# Altium PCB backplane.PCBDOC (part 4 of 4)
Units mil, origin at the board's own origin, x right, y up, seen from the top; angles counter-clockwise.
Board outline 14000 x 4750 mil, 6 copper layers (Top Layer, Internal Plane 1, Mid-Layer 1, Mid-Layer 2, Internal Plane 2, Bottom Layer), stack 54.4 mil thick; 197 components, 240 nets, 1698 pads, 1024 vias.
Unrouted connection lines stored in the file: 2.
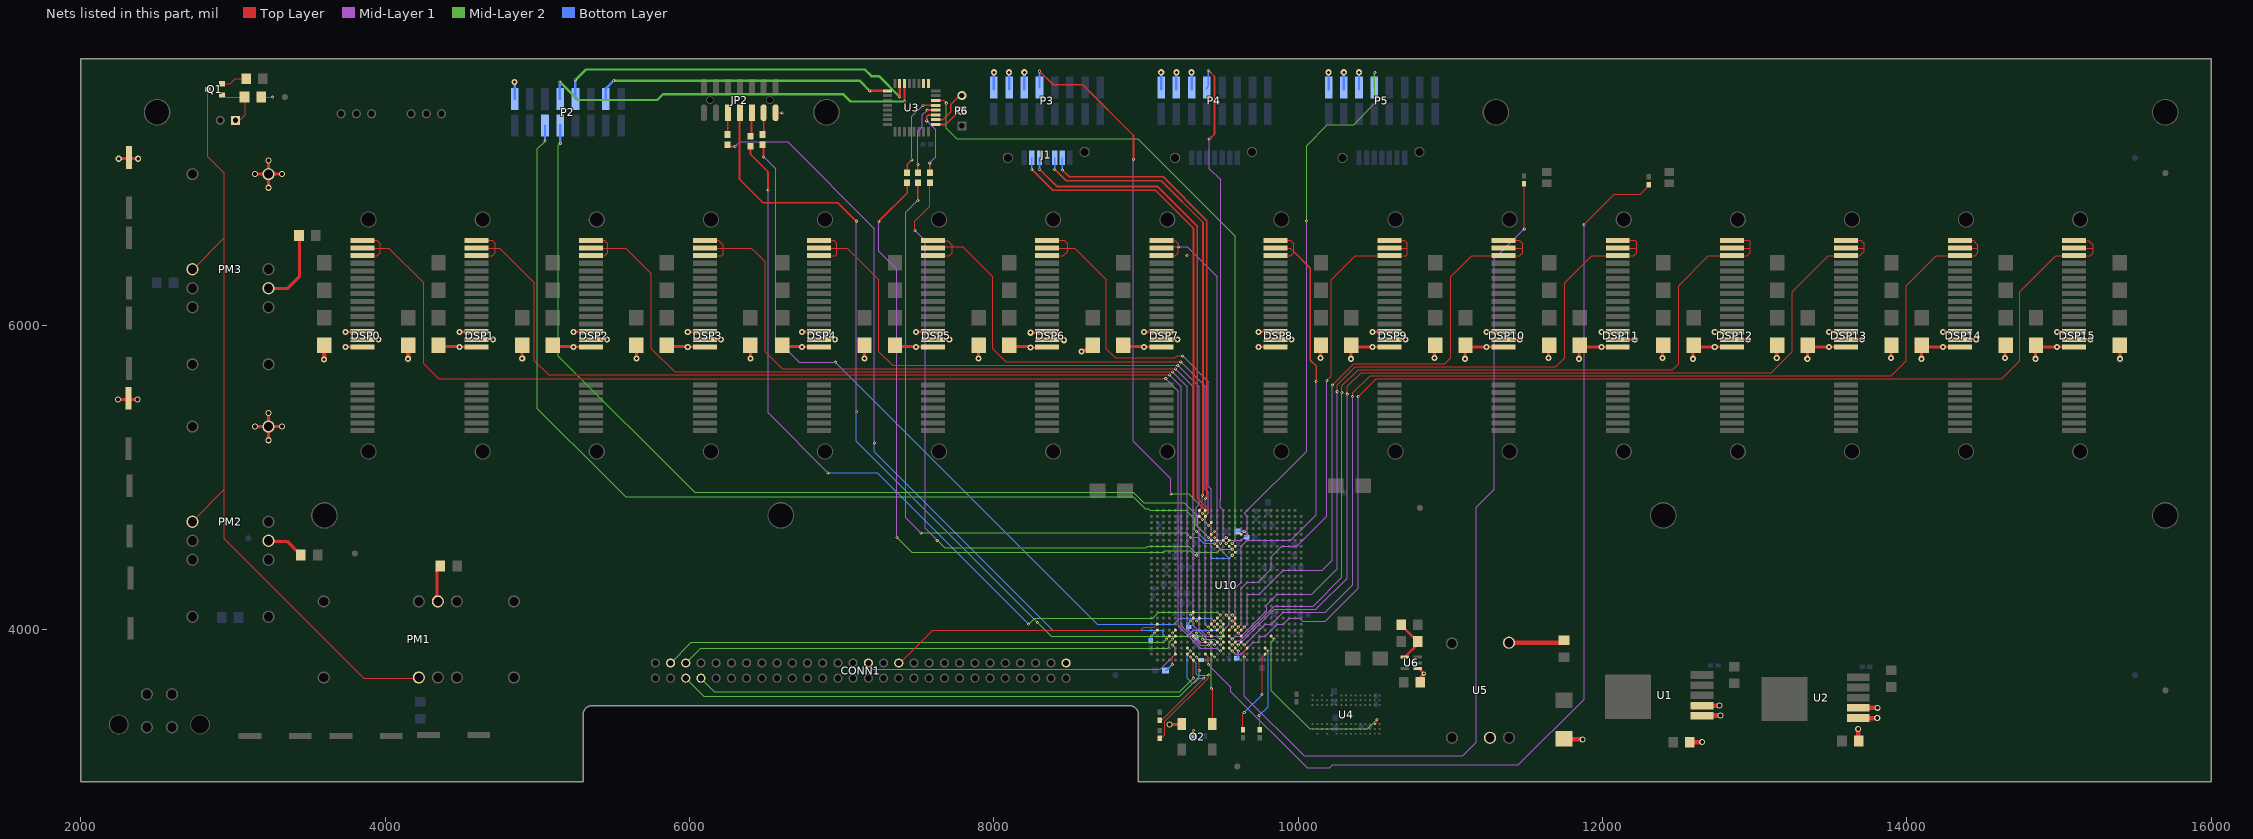
[diagram p8: the nets of this part, all layers, seen from the top]

## Via types
v1: diameter 40, hole 20, Top Layer to Bottom Layer, 338 vias
v2: diameter 20, hole 10, Top Layer to Bottom Layer, tented top, 325 vias
v3: diameter 20, hole 10, Top Layer to Bottom Layer, 197 vias
v4: diameter 40, hole 25, Top Layer to Bottom Layer, 113 vias
v5: diameter 50, hole 25, Top Layer to Bottom Layer, 48 vias
v6: diameter 30, hole 15, Top Layer to Bottom Layer, 3 vias

## Nets (pads, with @x,y where several pads share a name; then routed paths per layer and width w, separated by ;. In a path a pad name is that pad's centre, name@x,y a point inside that pad or via, vN(x,y) a via of type N, cw(c..) or ccw(c..) an arc to the next point about the centre after c; other vN are vias at no path point) (continued)
NetDSP0_P13: DSP0.P13 DSP0.P14 DSP0.P15 U10.AD13 | length 8285.4
  Top Layer w6: DSP0.P14@3850.63,6507.4 4024.09,6507.4 4251.97,6279.53 4251.97,5748.03 4350.39,5649.61 v3(9129.92,5649.61) ; v2(9488.19,3858.27) U10.AD13@9507.87,3877.95
  Top Layer w8: DSP0.P13@3850.63,6457.4 3851.34,6456.69 3946.85,6456.69 3966.54,6476.38 3966.54,6535.43 3944.57,6557.4 DSP0.P15@3850.63,6557.4
  Mid-Layer 1 w6: v3(9129.92,5649.61) 9212.6,5566.93 9212.6,4025.59 9360.24,3877.95 9468.5,3877.95 v2(9488.19,3858.27)
NetDSP1_P13: DSP1.P13 DSP1.P14 DSP1.P15 U10.AC11 | length 7460.1
  Top Layer w6: DSP1.P14@4600.63,6507.4 4752.44,6507.4 4980.31,6279.53 4980.31,5767.72 5074.8,5673.23 v3(9153.54,5673.23) ; v2(9409.45,3897.64) U10.AC11@9429.13,3917.32
  Top Layer w8: DSP1.P13@4600.63,6457.4 4705.43,6457.4 4724.41,6476.38 4724.41,6535.43 4702.44,6557.4 DSP1.P15@4600.63,6557.4
  Mid-Layer 1 w6: v3(9153.54,5673.23) 9232.28,5594.49 9232.28,4025.59 9360.24,3897.64 v2(9409.45,3897.64)
NetDSP2_P13: DSP2.P13 DSP2.P14 DSP2.P15 U10.AC12 | length 6713.8
  Top Layer w6: DSP2.P14@5362.68,6507.4 5579.21,6507.4 5748.03,6338.58 5748.03,5846.46 5901.57,5692.91 v3(9173.23,5692.91) ; v2(9448.82,3897.64) U10.AC12@9468.5,3917.32
  Top Layer w8: DSP2.P13@5350.63,6457.4 5443.62,6457.4 5462.6,6476.38 5462.6,6535.43 5440.63,6557.4 DSP2.P15@5350.63,6557.4
  Mid-Layer 1 w6: v3(9173.23,5692.91) 9271.65,5594.49 9271.65,4005.91 9360.24,3917.32 9429.13,3917.32 v2(9448.82,3897.64)
NetDSP3_P13: DSP3.P13 DSP3.P14 DSP3.P15 U10.AC13 | length 6077.1
  Top Layer w6: DSP3.P14@6100.63,6507.4 6405.98,6507.4 6437.01,6476.38 6496.06,6417.32 6496.06,5826.77 6610.24,5712.6 v3(9192.91,5712.6) ; v2(9488.19,3897.64) U10.AC13@9507.87,3917.32
  Top Layer w8: DSP3.P13@6100.63,6457.4 6211.34,6457.4 6220.47,6466.54 6220.47,6525.59 6188.66,6557.4 DSP3.P15@6100.63,6557.4
  Mid-Layer 1 w6: v3(9192.91,5712.6) 9311.02,5594.49 9311.02,4025.59 9399.61,3937.01 9448.82,3937.01 v2(9488.19,3897.64)
NetDSP4_P13: DSP4.P13 DSP4.P14 DSP4.P15 U10.AB13 | length 5271.2
  Top Layer w6: DSP4.P14@6850.63,6507.4 7035.91,6507.4 7244.09,6299.21 7244.09,5826.77 7334.65,5736.22 v3(9208.66,5736.22) ; v2(9488.19,3937.01) U10.AB13@9507.87,3956.69
  Top Layer w8: DSP4.P13@6850.63,6457.4 6959.37,6457.4 6968.5,6466.54 6968.5,6535.43 6946.54,6557.4 DSP4.P15@6850.63,6557.4
  Mid-Layer 1 w6: v3(9208.66,5736.22) 9350.76,5594.13 9350.76,4901.57 ; 9350.39,4665.35 9330.71,4685.04 9330.71,4803.15 9350.39,4822.83 9350.39,4901.57 ; 9350.76,4665.35 9350.76,4005.54 9399.61,3956.69 9468.5,3956.69 v2(9488.19,3937.01)
NetDSP5_P13: DSP5.P13 DSP5.P14 DSP5.P15 U10.AA11 | length 4392.3
  Top Layer w6: DSP5.P14@7618.11,6515.75 7795.28,6515.75 7992.13,6318.9 7992.13,5846.46 8078.74,5759.84 v3(9228.35,5759.84) ; v2(9409.45,4015.75) U10.AA11@9429.13,3996.06
  Top Layer w8: DSP5.P13@7598.43,6466.54 7607.56,6457.4 7707.4,6457.4 7726.38,6476.38 7726.38,6525.59 7696.85,6555.12 DSP5.P15@7598.43,6555.12
  Mid-Layer 1 w6: v3(9228.35,5759.84) 9389.76,5598.43 9389.76,4921.26 9409.45,4901.57 9409.45,4763.78 9389.76,4744.09 9389.76,4035.43 v2(9409.45,4015.75)
NetDSP6_P13: DSP6.P13 DSP6.P14 DSP6.P15 U10.AA12 | length 3693.1
  Top Layer w6: DSP6.P14@8350.63,6507.4 8531.97,6507.4 8740.16,6299.21 8740.16,5846.46 8799.21,5787.4 9192.91,5787.4 9204.72,5799.21 v3(9240.16,5799.21) ; v2(9448.82,4015.75) U10.AA12@9468.5,3996.06
  Top Layer w8: DSP6.P13@8350.63,6457.4 8455.43,6457.4 8484.25,6486.22 8484.25,6535.43 8462.28,6557.4 DSP6.P15@8350.63,6557.4
  Mid-Layer 1 w6: v3(9240.16,5799.21) 9409.45,5629.92 9409.45,4940.94 9429.13,4921.26 9429.13,4035.43 v2(9448.82,4015.75)
NetDSP7_P13: DSP7.P13 DSP7.P14 DSP7.P15 U10.AA13 | length 3135.5
  Top Layer w6: DSP7.P13@9114.17,6456.69 9192.91,6456.69 9212.6,6476.38 9212.6,6535.43 9192.91,6555.12 DSP7.P15@9114.17,6555.12 ; DSP7.P14@9114.17,6515.75 v3(9212.6,6515.75) ; v2(9488.19,3976.38) U10.AA13@9507.87,3996.06
  Mid-Layer 1 w6: v3(9212.6,6515.75) 9271.65,6515.75 9468.5,6318.9 9468.5,4547.24 9547.24,4468.5 9547.24,4035.43 v2(9488.19,3976.38)
  other v3: 9270.94,6457.4
NetDSP8_P13: DSP8.P13 DSP8.P14 DSP8.P15 U10.AA14 | length 3397.5
  Top Layer w6: U10.AA14@9547.24,3996.06 v2(9566.93,4015.75) ; DSP8.P14@9850.63,6507.4 9949.29,6507.4 9971.08,6485.61
  Top Layer w8: DSP8.P15@9850.63,6557.4 9948.5,6557.4 9970.47,6535.43 9970.47,6476.38 9950.79,6456.69 DSP8.P13@9852.36,6456.69
  Top Layer w11: 9970.47,6485 10080,6375.47 10080,5770 10118.11,5731.89 v3(10118.11,5629.92)
  Mid-Layer 1 w6: v2(9566.93,4015.75) 9586.61,4035.43 9586.61,4271.65 9625.98,4311.02 9625.98,4547.24 9665.35,4586.61 9950.79,4586.61 10118.11,4753.94 v3(10118.11,5629.92)
NetDSP9_P13: DSP9.P13 DSP9.P14 DSP9.P15 U10.AA15 | length 3546.8
  Top Layer w6: U10.AA15@9586.61,3996.06 v2(9606.3,4015.75) ; v3(10188.98,5637.8) 10216.54,5665.35 10216.54,6299.21 10374.72,6457.4 DSP9.P13@10600.63,6457.4
  Top Layer w8: DSP9.P13@10600.63,6457.4 10709.37,6457.4 10718.5,6466.54 10718.5,6535.43 10696.54,6557.4 DSP9.P15@10600.63,6557.4 ; DSP9.P14@10600.63,6507.4 10717.01,6507.4
  Mid-Layer 1 w6: v2(9606.3,4015.75) 9625.98,4035.43 9625.98,4271.65 9665.35,4311.02 9734.25,4311.02 9822.83,4399.61 9822.83,4478.35 9891.73,4547.24 9992.13,4547.24 10188.98,4744.09 v3(10188.98,5637.8)
NetDSP10_P13: DSP10.P13 DSP10.P14 DSP10.P15 U10.AA16 | length 4290.2
  Top Layer w6: U10.AA16@9625.98,3996.06 v2(9645.67,4015.75) ; v3(10224.41,5606.3) 10366.14,5748.03 10964.57,5748.03 11003.94,5787.4 11003.94,6318.9 11142.44,6457.4 DSP10.P13@11350.63,6457.4
  Top Layer w8: DSP10.P13@11350.63,6457.4 11457.4,6457.4 11476.38,6476.38 11476.38,6535.43 11454.41,6557.4 DSP10.P15@11350.63,6557.4 ; DSP10.P14@11350.63,6507.4 11474.88,6507.4
  Mid-Layer 1 w6: v2(9645.67,4015.75) 9665.35,4035.43 9665.35,4222.44 9675.2,4232.28 9744.09,4232.28 9901.57,4389.76 10157.48,4389.76 10224.41,4456.69 v3(10224.41,5606.3)
NetDSP11_P13: DSP11.P13 DSP11.P14 DSP11.P15 U10.AB14 | length 5022.8
  Top Layer w6: U10.AB14@9547.24,3956.69 v2(9566.93,3937.01) ; v3(10255.91,5562.99) 10255.91,5610.24 10374.02,5728.35 11692.91,5728.35 11751.97,5787.4 11751.97,6279.53 11929.13,6456.69 DSP11.P13@12100.63,6456.69
  Top Layer w8: DSP11.P14@12100.63,6507.4 12222.91,6507.4 ; DSP11.P15@12100.63,6557.4 12212.28,6557.4 12224.41,6545.28 12224.41,6476.38 12204.72,6456.69 DSP11.P13@12155.51,6456.69
  Mid-Layer 1 w6: v2(9566.93,3937.01) 9586.61,3956.69 9625.98,3956.69 9793.31,4124.02 9793.31,4163.39 9862.2,4232.28 10088.58,4232.28 10255.91,4399.61 v3(10255.91,5562.99)
NetDSP12_P13: DSP12.P13 DSP12.P14 DSP12.P15 U10.AC14 | length 5816.3
  Top Layer w6: U10.AC14@9547.24,3917.32 v2(9566.93,3897.64) ; v3(10287.4,5559.06) 10287.4,5602.36 10393.7,5708.66 12460.63,5708.66 12500,5748.03 12500,6259.84 12696.85,6456.69 DSP12.P13@12854.33,6456.69
  Top Layer w8: DSP12.P14@12850.63,6507.4 12970.94,6507.4 ; DSP12.P15@12850.63,6557.4 12960.31,6557.4 12972.44,6545.28 12972.44,6476.38 12952.76,6456.69 DSP12.P13@12893.7,6456.69
  Mid-Layer 1 w6: v2(9566.93,3897.64) 9596.46,3927.17 9616.14,3927.17 9843.22,4154.24 9950.09,4154.24 ; 9950.09,4153.54 10098.43,4153.54 10108.58,4163.7 10287.4,4342.52 v3(10287.4,5559.06)
NetDSP13_P13: DSP13.P13 DSP13.P14 DSP13.P15 U10.AC15 | length 6469.5
  Top Layer w6: U10.AC15@9586.61,3917.32 v2(9606.3,3897.64) ; v3(10322.83,5547.24) 10322.83,5598.43 10413.39,5688.98 13110.24,5688.98 13248.03,5826.77 13248.03,6220.47 13484.25,6456.69 DSP13.P13@13602.36,6456.69
  Top Layer w8: DSP13.P14@13600.63,6507.4 13718.98,6507.4 ; DSP13.P15@13600.63,6557.4 13698.5,6557.4 13720.47,6535.43 13720.47,6486.22 13690.94,6456.69 DSP13.P13@13612.2,6456.69
  Mid-Layer 1 w6: v2(9606.3,3897.64) 9842.52,4133.86 10118.11,4133.86 10123.69,4139.44 10322.83,4338.58 v3(10322.83,5547.24)
NetDSP14_P13: DSP14.P13 DSP14.P14 DSP14.P15 U10.AC16 | length 7228.4
  Top Layer w6: U10.AC16@9625.98,3917.32 v2(9645.67,3897.64) ; v3(10358.27,5531.5) 10358.27,5555.12 10472.44,5669.29 13897.64,5669.29 13996.06,5767.72 13996.06,6259.84 14193.62,6457.4 DSP14.P13@14350.63,6457.4
  Top Layer w8: DSP14.P14@14350.39,6505.91 14458.66,6505.91 14468.5,6496.06 ; DSP14.P15@14350.63,6557.4 14436.69,6557.4 14468.5,6525.59 14468.5,6476.38 14448.82,6456.69 DSP14.P13@14370.08,6456.69
  Mid-Layer 1 w6: v2(9645.67,3897.64) 9741.14,3993.11 9783.46,4035.43 9822.83,4035.43 9901.57,4114.17 10177.17,4114.17 10358.27,4295.28 v3(10358.27,5531.5)
NetDSP15_P13: DSP15.P13 DSP15.P14 DSP15.P15 U10.AD14 | length 8113
  Top Layer w6: U10.AD14@9547.24,3877.95 v2(9566.93,3858.27) ; v3(10393.7,5531.5) 10511.81,5649.61 14625.98,5649.61 14744.09,5767.72 14744.09,6220.47 14980.32,6456.69 DSP15.P13@15098.43,6456.69
  Top Layer w8: DSP15.P15@15098.43,6555.12 15196.85,6555.12 15226.38,6525.59 15226.38,6476.38 15206.69,6456.69 DSP15.P13@15118.11,6456.69 ; DSP15.P14@15100.63,6507.4 15224.88,6507.4
  Mid-Layer 1 w6: v2(9566.93,3858.27) 9586.61,3838.58 9625.98,3838.58 9704.97,3917.57 9734.5,3917.57 9744.09,3927.17 9744.09,3946.67 9753.94,3956.52 9783.29,3956.52 9862.2,4035.43 9901.57,4035.43 9940.94,4074.8 10009.84,4074.8 10029.53,4055.12 10177.17,4055.12 10393.7,4271.65 v3(10393.7,5531.5)
NetJP1_1: JP1.1 Q1.2 R4.2 | length 367
  Top Layer w6: Q1.2@2926.26,7512.6 2940.16,7512.6 2952.76,7500 R4.2@3074.88,7500 ; JP1.1@3011.81,7342.52 3041.34,7342.52 3080.71,7381.89 R4.2@3080.71,7509.84
NetO2_3: O2.3 U10.AC10 | length 640.5
  Top Layer w6: v2(9370.08,3937.01) U10.AC10@9389.76,3917.32 ; v3(9429.13,3612.2) 9438.98,3602.36 O2.3@9438.98,3375.98
  Mid-Layer 2 w6: v2(9370.08,3937.01) 9409.45,3937.01 9429.13,3917.32 v3(9429.13,3612.2)
NetP2_6: P2.6 U10.F14 | length 6843.2
  Top Layer w6: v2(9527.56,4606.3) U10.F14@9547.24,4586.61
  Mid-Layer 2 w6: v3(5050,7210) 5000,7160 5000,5452.76 5442.1,5010.65 5580.71,4872.05 8917.32,4872.05 8996.06,4793.31 9015.75,4793.31 9025.59,4783.46 9261.81,4783.46 9320.87,4724.41 9320.87,4655.51 v2(9330.71,4645.67)
  Bottom Layer w6: v2(9330.71,4645.67) 9389.76,4586.61 9507.87,4586.61 v2(9527.56,4606.3)
  Bottom Layer w16: v3(5050,7210) P2.6@5050,7312.6
NetP2_7: P2.7 U3.22 | length 2582.6
  Top Layer w16: v3(7412.76,7469.13) U3.22@7412.76,7588.46
  Mid-Layer 2 w16: v3(5147.64,7598.43) 5265.75,7480.31 5787.4,7480.31 5826.77,7519.69 7007.87,7519.69 7057.09,7470.47 7411.42,7470.47 v3(7412.76,7469.13)
  Bottom Layer w16: v3(5147.64,7598.43) 5147.64,7489.76 P2.7@5150,7487.4
NetP2_8: P2.8 U10.F11 | length 6356
  Top Layer w6: v2(9409.45,4606.3) U10.F11@9429.13,4586.61
  Mid-Layer 2 w6: v3(5150,7195) 5137.8,7182.8 5137.8,5797.24 6033.46,4901.57 8917.32,4901.57 8986.22,4832.68 9251.97,4832.68 9340.55,4744.09 9340.55,4675.2 v2(9409.45,4606.3)
  Bottom Layer w16: v3(5150,7195) P2.8@5150,7315
NetP2_9: P2.9 U3.23 | length 2447.1
  Top Layer w16: v3(7381.26,7500.63) U3.23@7381.26,7588.46
  Mid-Layer 2 w16: v3(5250,7612.2) 5318.8,7681 7151.68,7681 7194.88,7637.8 7244.09,7637.8 v3(7381.26,7500.63)
  Bottom Layer w16: P2.9@5250,7487.4 v3(5250,7612.2)
NetP2_13: P2.13 U3.25 | length 1970.1
  Top Layer w16: v3(7184.17,7540.24) U3.25@7301.54,7540.24
  Mid-Layer 2 w16: v3(5501.97,7608.27) 7116.14,7608.27 v3(7184.17,7540.24)
  Bottom Layer w16: P2.13@5450,7487.4 5450,7556.3 v3(5501.97,7608.27)
NetP3_7: P3.7 U10.C11 | length 3763.4
  Top Layer w6: v2(9409.45,4685.04) U10.C11@9429.13,4704.72
  Top Layer w11: v3(8300,7670) 8390,7580 8585,7580 8917.32,7247.68 v3(8917.32,7090)
  Mid-Layer 1 w6: v3(8917.32,7090) 8917.32,5236.22 9163.39,4990.16 v3(9163.39,4891.73)
  Mid-Layer 2 w6: v3(9163.39,4891.73) 9281.5,4891.73 9389.76,4783.46 9389.76,4704.72 v2(9409.45,4685.04)
  Bottom Layer w11: P3.7@8300,7562.4 v3(8300,7670)
NetP4_7: P4.7 U10.F12 | length 3372.1
  Top Layer w6: v2(9448.82,4606.3) U10.F12@9468.5,4586.61 v2(9488.19,4566.93)
  Top Layer w11: v3(9410,7675) 9450,7635 9450,7255 9420,7225 v3(9415,7225)
  Mid-Layer 1 w6: v3(9415,7225) 9415,7030 9490,6955 9490,4854.17 9488.19,4852.36 9488.19,4803.15 9507.87,4783.46 9507.87,4586.61 v2(9488.19,4566.93)
  Bottom Layer w11: P4.7@9395,7555 9410,7570 v3(9410,7675)
NetP5_7: P5.7 U10.F13 | length 3787.9
  Top Layer w6: U10.F13@9507.87,4586.61 v2(9527.56,4566.93)
  Mid-Layer 1 w6: v2(9527.56,4566.93) 9547.22,4586.59 9625.96,4586.59 9665.35,4625.98 9665.35,4744.09 9645.82,4763.63 10055,5172.81 v3(10055,6685)
  Mid-Layer 2 w6: v3@10055.12,6685 10055.12,7181.1 10192.91,7318.9 10363.9,7318.9 10505,7460 v3(10505,7660)
  Bottom Layer w11: P5.7@10500,7562.4 10500,7655 v3(10505,7660)
NetP6_2: P6.2 U3.9 | length 214.8
  Top Layer w11: U3.9@7618.46,7319.76 7683.94,7319.76 7775.59,7411.42 P6.2@7795.28,7411.42
NetP6_3: P6.3 U3.10 | length 251.6
  Top Layer w11: U3.10@7618.46,7351.26 7666.22,7351.26 7716.54,7401.57 7716.54,7450.79 P6.3@7775.59,7509.84
NetPM1_4: PM1.4 R2.2 | length 216.5
  Top Layer w20: PM1.4@4340.55,4183.07 R2.2@4340.55,4399.61
NetPM2_4: PM2.4 R1.2 | length 249
  Top Layer w20: PM2.4@3233.15,4580 3354.88,4580 R1.2@3444.88,4490
NetPM3_4: PM3.4 R14.2 | length 495.2
  Top Layer w20: PM3.4@3228.35,6240.16 3356.3,6240.16 3435.04,6318.9 R14.2@3435.04,6574.8
NetQ1_3: Q1.3 R7.1 | length 172.1
  Top Layer w6: Q1.3@2926.26,7587.4 2981.1,7587.4 3013.7,7620 R7.1@3084.88,7620
NetR3_1: R3.1 U10.Y12 | length 5507.4
  Top Layer w6: U10.Y12@9468.5,4035.43 v2(9488.19,4015.75)
  Top Layer w11: R3.1@6261.34,7175.2 v3(6299.21,7175.2)
  Mid-Layer 1 w6: v3(6299.21,7175.2) 6328.74,7204.72 6643.7,7204.72 7214.57,6633.86 v3(7214.57,5226.38)
  Bottom Layer w6: v3(7214.57,5226.38) 7214.57,5167.32 8385.83,3996.06 9104.33,3996.06 9114.17,3986.22 9114.17,3966.54 9124.02,3956.69 9271.65,3956.69 9311.02,3996.06 9468.5,3996.06 v2(9488.19,4015.75)
NetR5_1: R5.1 U10.Y11 | length 5027
  Top Layer w6: U10.Y11@9429.13,4035.43 v2(9448.82,4055.12)
  Top Layer w11: v3(6486.22,7106.3) R5.1@6486.22,7194.88
  Mid-Layer 1 w6: v3(6486.22,7106.3) 6564.96,7027.56 6564.96,5915.35 6722.44,5757.87 v3(6958.66,5757.87)
  Bottom Layer w6: v3(6958.66,5757.87) 8681.1,4035.43 9183.07,4035.43 9222.44,4074.8 9429.13,4074.8 v2(9448.82,4055.12)
NetR6_2: R6.2 U10.W12 | length 5423.3
  Top Layer w6: U10.W12@9468.5,4074.8 v2(9488.19,4094.49)
  Top Layer w11: R6.2@6400,7182.68 6400,7123.62 6515.75,7007.87 v3(6515.75,6889.76)
  Mid-Layer 1 w6: v3(6515.75,6889.76) 6515.75,5423.23 v3(6909.45,5029.53)
  Mid-Layer 2 w6: v3(8228.35,4035.43) 8267.72,4074.8 9045.28,4074.8 9084.65,4114.17 9468.5,4114.17 v2(9488.19,4094.49)
  Bottom Layer w6: v3(6909.45,5029.53) 7234.25,5029.53 v3(8228.35,4035.43)
NetR9_1: R9.1 U3.13 | length 569.6
  Top Layer w11: R9.1@7430,7003.46 7430,7055.98 v3(7460.63,7086.61) ; v3(7534.33,7445.75) U3.13@7618.46,7445.75
  Mid-Layer 1 w6: v3(7460.63,7086.61) 7460.63,7372.05 v3(7534.33,7445.75)
NetR9_2: R9.2 U10.H15 | length 4790
  Top Layer w6: v2(9566.93,4488.19) U10.H15@9586.61,4507.87
  Top Layer w11: v3(7244.09,6683.07) 7430,6868.98 R9.2@7430,6936.54
  Mid-Layer 1 w6: v3(7244.09,6683.07) 7244.09,6486.22 7362.2,6368.11 v3(7362.2,4606.3)
  Mid-Layer 2 w6: v3(7362.2,4606.3) 7460.63,4507.87 9114.17,4507.87 9124.02,4517.72 9291.34,4517.72 9320.87,4488.19 v2(9330.71,4488.19)
  Bottom Layer w6: v2(9330.71,4488.19) 9350.39,4507.87 9419.29,4507.87 9429.13,4498.03 9429.13,4478.35 9438.98,4468.5 9547.24,4468.5 v2(9566.93,4488.19)
NetR10_1: R10.1 U3.12 | length 488.6
  Top Layer w11: R10.1@7500,7007.87 v3(7500,7057.09) ; v3(7561.89,7414.25) U3.12@7618.46,7414.25
  Mid-Layer 1 w6: v3(7500,7057.09) 7500,7273.62 7529.53,7303.15 7529.53,7381.89 v3(7561.89,7414.25)
NetR10_2: R10.2 U10.G12 | length 4362
  Top Layer w6: v2(9448.82,4566.93) U10.G12@9468.5,4547.24
  Top Layer w11: v3(7500,6820.87) R10.2@7500,6938.98
  Mid-Layer 1 w6: v3(7500,6820.87) 7421.26,6742.13 7421.26,4734.25 v3(7519.69,4635.83)
  Mid-Layer 2 w6: v3(7519.69,4635.83) 9261.81,4635.83 v2(9291.34,4606.3)
  Bottom Layer w6: v2(9291.34,4606.3) 9340.55,4606.3 9379.92,4566.93 v2(9448.82,4566.93)
NetR11_1: R11.1 U3.11 | length 468.1
  Top Layer w11: v3(7559.06,7342.52) 7559.06,7372.05 7568.9,7381.89 U3.11@7618.11,7381.89 ; R11.1@7578.74,7007.87 v3(7578.74,7066.93)
  Mid-Layer 1 w6: v3(7559.06,7342.52) 7618.11,7283.46 7618.11,7106.3 v3(7578.74,7066.93)
NetR11_2: R11.2 U10.G14 | length 4470
  Top Layer w6: v3(7480.31,6624.02) 7480.31,6683.07 7578.74,6781.5 R11.2@7578.74,6938.98 ; U10.G14@9547.24,4547.24 v2(9566.93,4527.56)
  Mid-Layer 1 w6: v3(7480.31,6624.02) 7549.21,6555.12 7549.21,4665.35 v3(7627.95,4586.61)
  Mid-Layer 2 w6: v3(7627.95,4586.61) 7677.17,4537.4 9000.66,4537.4 9010.5,4547.24 9281.5,4547.24 9320.87,4507.87 9468.5,4507.87 9488.19,4527.56 v2(9566.93,4527.56)
NetR12_1: R12.1 U10.AD17 | length 5850.2
  Top Layer w6: v2(9645.67,3818.9) 9645.67,3858.27 U10.AD17@9665.35,3877.95 ; v3(11486.22,6633.86) R12.1@11486.22,6929.13
  Mid-Layer 1 w6: v2(9645.67,3818.9) 9645.67,3562.99 10039.37,3169.29 11082.68,3169.29 11171.26,3257.87 11171.26,4803.15 11289.37,4921.26 11289.37,6437.01 v3(11486.22,6633.86)
NetR13_1: R13.1 U10.AE10 | length 6683.7
  Top Layer w6: U10.AE10@9389.76,3838.58 9409.45,3818.9 v2(9409.45,3769.68) ; v3(11879.92,6663.39) 12076.77,6860.24 12248.7,6860.24 R13.1@12305,6916.54
  Mid-Layer 1 w6: v2(9409.45,3769.68) 9557.09,3622.05 9557.09,3592.52 10059.06,3090.55 10206.69,3090.55 10226.38,3110.24 11446.85,3110.24 11879.92,3543.31 v3(11879.92,6663.39)
NetR15_2: R15.2 U10.AE20 | length 560
  Top Layer w6: R15.2@9637.78,3340.54 9635.83,3342.49 9635.83,3444.88 v3(9645.67,3454.72) ; v3(9763.78,3572.83) 9763.78,3818.9 U10.AE20@9783.46,3838.58
  Bottom Layer w6: v3(9645.67,3454.72) v3(9763.78,3572.83)
NetR16_2: R16.2 U10.AD20 | length 571.6
  Top Layer w6: v3(9744.09,3435.04) 9748.01,3431.12 R16.2@9748.01,3340.54 ; U10.AD20@9783.46,3877.95 v2(9803.15,3858.27)
  Bottom Layer w6: v3(9744.09,3435.04) 9803.15,3494.09 v2(9803.15,3858.27)
NetR17_2: R17.2 R18.1 U6.4 | length 305.4
  Top Layer w16: R18.1@10669.29,4035.43 R17.2@10787.4,3917.32 ; U6.4@10700.77,3818.89 10797.24,3915.37 R17.2@10797.24,3917.32
NetR19_1: R19.1 U5.4 | length 342.5
  Top Layer w30: U5.4@11385.8,3913.38 R19.1@11728.34,3913.38
NetR20_2: R20.2 U10.AE7 | length 790.6
  Top Layer w6: R20.2@9090,3284.41 9101.34,3284.41 9124.02,3307.09 9124.02,3395.67 9409.45,3681.1 v3(9409.45,3700.79) ; U10.AE7@9271.65,3838.58 v2(9291.34,3818.9)
  Bottom Layer w6: v2(9291.34,3818.9) 9330.71,3779.53 9330.71,3710.63 9340.55,3700.79 v3(9409.45,3700.79)
NetR21_2: R21.2 U10.AD7 | length 750.4
  Top Layer w6: R21.2@9090,3404.41 9103.23,3404.41 v3(9379.92,3681.1) ; U10.AD7@9271.65,3877.95 v2(9291.34,3858.27)
  Bottom Layer w6: v2(9291.34,3858.27) 9271.65,3838.58 9271.65,3681.1 9301.18,3651.57 9320.87,3651.57 9350.39,3681.1 v3(9379.92,3681.1)
NetU3_14: U3.14 U10.G15 | length 4489.6
  Top Layer w6: U3.14@7618.46,7477.24 7670.39,7477.24 v3(7687.01,7460.63) ; v2(9566.93,4566.93) U10.G15@9586.61,4547.24
  Mid-Layer 2 w6: v3(7687.01,7460.63) 7687.01,7293.31 7755.91,7224.41 8946.85,7224.41 9586.61,6584.65 9586.61,4586.61 v2(9566.93,4566.93)
NetU3_17: U3.17
NetU3_18: U3.18
NEWFRAME: CONN1.23 U10.Y2 | length 1798.9
  Top Layer w6: CONN1.23@7381.89,3779.53 7598.43,3996.06 8966.54,3996.06 8986.22,4015.75 9055.12,4015.75 U10.Y2@9074.8,4035.43
NEXTFRAME: CONN1.27 U10.AC5 | length 2179.7
  Top Layer w6: v2(9173.23,3897.64) U10.AC5@9192.91,3917.32
  Mid-Layer 1 w6: CONN1.27@7165.35,3779.53 7204.72,3740.16 9094.49,3740.16 9192.91,3838.58 9192.91,3877.95 v2(9173.23,3897.64)
PSINHIBIT: PM1.8 PM2.8 PM3.8 Q1.1 | length 5240.9
  Top Layer w6: PM2.8@2736.22,4714.57 2942.91,4921.26 ; PM3.8@2736.22,6368.11 2942.91,6574.8 ; Q1.1@2834.65,7559.06 2834.65,7106.3 2942.91,6998.03 2942.91,4596.46 3858.27,3681.1 PM1.8@4212.6,3681.1
SCS: CONN1.53 U10.AB4 | length 3351.7
  Top Layer w6: v2(9133.86,3937.01) U10.AB4@9153.54,3956.69
  Mid-Layer 2 w6: CONN1.53@5875,3780 6012.32,3917.32 9114.17,3917.32 v2(9133.86,3937.01)
SERCLK: CONN1.50 U10.AF8 | length 3427.1
  Top Layer w6: v3(9311.02,3681.1) U10.AF8@9311.02,3799.21
  Mid-Layer 2 w6: CONN1.50@6075,3680 6162.48,3592.52 9222.44,3592.52 v3(9311.02,3681.1)
SI: CONN1.52 U10.AF9 | length 3585.1
  Top Layer w6: v3(9350.39,3730.32) U10.AF9@9350.39,3799.21
  Mid-Layer 2 w6: CONN1.52@5975,3680 6092.01,3562.99 9222.44,3562.99 9350.39,3690.94 v3(9350.39,3730.32)
SO: CONN1.51 U10.AB5 | length 3308.4
  Top Layer w6: v2(9173.23,3937.01) U10.AB5@9192.91,3956.69
  Mid-Layer 2 w6: CONN1.51@5975,3780 6072.95,3877.95 9143.7,3877.95 9153.54,3887.8 9153.54,3917.32 v2(9173.23,3937.01)
SYSRX+: J1.6 U10.A10 | length 3184
  Top Layer w11: v3(8250,7025) 8387.5,6887.5 9062.5,6887.5 9312.5,6637.5 9312.5,4860.73 U10.A10@9389.76,4783.46
  Bottom Layer w11: v3(8250,7025) J1.6@8250,7100
SYSRX-: J1.5 U10.B10 | length 3211.7
  Top Layer w6: 9361.42,4841.33 9409.45,4793.31 9409.45,4763.78 U10.B10@9389.76,4744.09
  Top Layer w11: v3(8300,7025) 8412.5,6912.5 9075,6912.5 9337.5,6650 9337.5,4865.26 9361.42,4841.33
  Bottom Layer w11: v3(8300,7025) J1.5@8300,7100
SYSTX+: J1.2 U10.A9 | length 3131.7
  Top Layer w6: U10.A9@9350.39,4783.46 v2(9370.08,4763.78)
  Top Layer w11: v3(8450,7020) 8495,6975 9112.5,6975 9400,6687.5 9400,4872.44 v3(9389.76,4862.2)
  Mid-Layer 1 w6: v2(9370.08,4763.78) 9389.76,4783.46 v3(9389.76,4862.2)
  Bottom Layer w11: v3(8450,7020) J1.2@8450,7100
SYSTX-: J1.3 U10.B9 | length 3191.8
  Top Layer w6: U10.B9@9350.39,4744.09 v2(9370.08,4724.41)
  Top Layer w11: v3(8400,7025) 8475,6950 9100,6950 9375,6675 9375,4886.81 v3(9370.08,4881.89)
  Mid-Layer 1 w6: v2(9370.08,4724.41) 9350.39,4744.09 9350.39,4783.46 9370.08,4803.15 v3(9370.08,4881.89)
  Bottom Layer w11: v3(8400,7025) J1.3@8400,7100
TCK: JP2.6 R6.1 | length 161.2
  Top Layer w11: R6.1@6400,7243.46 6407.48,7250.94 JP2.6@6407.48,7401.57
TDI: JP2.10 R3.2 | length 138.3
  Top Layer w11: R3.2@6250,7253.46 JP2.10@6250,7391.73
TDO: JP2.8 U10.Y13 | length 5802.6
  Top Layer w6: v2(9488.19,4055.12) U10.Y13@9507.87,4035.43
  Top Layer w11: JP2.8@6328.74,7362.2 6328.74,6958.66 6482.4,6805 6975,6805 v3(7096.46,6683.54)
  Mid-Layer 1 w6: v3(7096.46,5433.07) v3(7096.46,6683.54)
  Mid-Layer 2 w6: v3(8287.4,4045.28) 8375.98,3956.69 9498.03,3956.69 9507.87,3966.54 9507.87,4035.43 v2(9488.19,4055.12)
  Bottom Layer w6: v3(7096.46,5433.07) 7096.46,5236.22 v3(8287.4,4045.28)
TMS: JP2.4 R5.2 | length 141.9
  Top Layer w11: R5.2@6480,7257.56 6487.48,7265.04 JP2.4@6487.48,7396.34
UDQS: U4.B7 U10.AB21 | length 1239.9
  Top Layer w6: U10.AB21@9822.83,3956.69 v2(9842.52,3937.01) ; U4.B7@10503.94,3377.95 10519.68,3393.7 v3(10519.68,3409.45)
  Mid-Layer 2 w6: v2(9842.52,3937.01) 9822.83,3917.32 9822.83,3598.43 10074.8,3346.46 10456.69,3346.46 v3(10519.68,3409.45)
VCC: C2.1 C3.2 C4.2 C5.1 C7.1 C8.1 C10.1 C11.1 C13.1 C14.1 C17.2 C18.1 C19.1 C21.1 C22.1 C24.1 C25.1 C30.1 C31.1 C75.1 C77.1 C80.1 C81.1 C82.1 C83.1 C108.1 C109.1 C110.1 C117.1 CONN1.1 DSP0.P1 DSP0.P2 DSP0.P3 DSP1.P1 DSP1.P2 DSP1.P3 DSP2.P1 DSP2.P2 DSP2.P3 DSP3.P1 DSP3.P2 DSP3.P3 DSP4.P1 DSP4.P2 DSP4.P3 DSP5.P1 DSP5.P2 DSP5.P3 DSP6.P1 DSP6.P2 DSP6.P3 DSP7.P1 DSP7.P2 DSP7.P3 JP2.2 O2.4 P2.1 P3.1 P3.3 P3.5 P4.1 P4.3 P4.5 P5.1 P5.3 P5.5 PM2.6 R4.1 U1.1 U1.2 U2.1 U2.2 U5.2 U6.1 U10.AA2 U10.AA5 U10.AB8 U10.AB11 U10.AB16 U10.AD15 U10.AE5 U10.AE8 U10.AE11 U10.E11 U10.E16 U10.V8 U10.W8 U10.W9 U10.W14 U10.W15 U10.Y15 | length 7941.8
  Top Layer w6: R4.1@3185.12,7500 v3(3257.87,7500) ; JP2.2@6566.22,7396.34 v3(6608.94,7396.34) ; v2(9055.12,3976.38) U10.AA2@9074.8,3996.06 ; v2(9173.23,3769.68) 9173.23,3818.9 U10.AE5@9192.91,3838.58 ; v2(9173.23,3976.38) U10.AA5@9192.91,3996.06 ; v2(9291.34,4055.12) U10.W8@9311.02,4074.8 ; v2(9291.34,4094.49) U10.V8@9311.02,4114.17 ; U10.AE8@9311.02,3838.58 v2(9330.71,3818.9) ; U10.AB8@9311.02,3956.69 v2(9330.71,3976.38) ; v2(9330.71,4055.12) U10.W9@9350.39,4074.8 ; v2(9409.45,3976.38) U10.AB11@9429.13,3956.69 ; U10.AE11@9429.13,3838.58 v2(9448.82,3818.9) ; U10.E11@9429.13,4625.98 v2(9448.82,4645.67) ; v2(9527.56,4094.49) U10.W14@9547.24,4074.8 ; v2(9566.93,4055.12) U10.Y15@9586.61,4035.43 ; v2(9566.93,4094.49) U10.W15@9586.61,4074.8 ; U10.AD15@9586.61,3877.95 v2(9606.3,3858.27) ; v2(9606.3,3976.38) U10.AB16@9625.98,3956.69 ; U10.E16@9625.98,4625.98 v2(9645.67,4645.67)
  Top Layer w16: U6.1@10785.41,3744.09 10793.31,3744.09 v6(10826.77,3710.63) 10797.24,3681.1 C3.2@10797.24,3651.57
  Top Layer w18: v1(3738.17,5858.26) DSP0.P1@3852.34,5858.26 ; v1(3738.17,5956.68) DSP0.P3@3852.34,5956.68 ; DSP0.P2@3850.63,5907.4 v1(3956.74,5907.4) ; v1(4488.17,5858.26) DSP1.P1@4602.34,5858.26 ; v1(4488.17,5956.68) DSP1.P3@4602.34,5956.68 ; DSP1.P2@4600.63,5907.4 v1(4706.74,5907.4) ; v1(5238.17,5858.26) DSP2.P1@5352.34,5858.26 ; v1(5238.17,5956.68) DSP2.P3@5352.34,5956.68 ; DSP2.P2@5350.63,5907.4 v1(5456.74,5907.4) ; v1(5988.17,5858.26) DSP3.P1@6102.34,5858.26 ; v1(5988.17,5956.68) DSP3.P3@6102.34,5956.68 ; DSP3.P2@6100.63,5907.4 v1(6206.74,5907.4) ; v1(6738.17,5858.26) DSP4.P1@6852.34,5858.26 ; v1(6738.17,5956.68) DSP4.P3@6852.34,5956.68 ; DSP4.P2@6850.63,5907.4 v1(6956.74,5907.4) ; v1(7488.17,5858.26) DSP5.P1@7602.34,5858.26 ; v1(7488.17,5956.68) DSP5.P3@7602.34,5956.68 ; DSP5.P2@7600.63,5907.4 v1(7706.74,5907.4) ; v1(8241.85,5852.42) DSP6.P1@8356.02,5852.42 ; v1(8241.85,5950.84) DSP6.P3@8356.02,5950.84 ; DSP6.P2@8354.31,5901.56 v1(8460.42,5901.56) ; v1(8988.17,5858.26) DSP7.P1@9102.34,5858.26 ; v1(8988.17,5956.68) DSP7.P3@9102.34,5956.68 ; DSP7.P2@9100.63,5907.4 v1(9206.74,5907.4)
  Top Layer w20: v4(2244.09,5511.81) v4(2372.05,5511.81) ; v4(3142.7,5333.65) PM2.6@3232.28,5333.65 ; v4(3232.28,5244.08) PM2.6@3232.28,5333.65 ; v4(3232.28,5423.23) PM2.6@3232.28,5333.65 ; v4(3321.85,5333.65) PM2.6@3232.28,5333.65 ; C8.1@4350,5861.57 4484.85,5861.57 v1(4488.17,5858.26) ; v1(4900,5781.89) C10.1@4900,5861.57 ; C11.1@5100,5861.57 v1@5234.85,5861.57 ; v1(5650,5781.89) C13.1@5650,5861.57 ; C14.1@5850,5861.57 v1@5984.85,5861.57 ; v1(6400,5781.89) C18.1@6400,5861.57 ; C19.1@6600,5861.57 v1@6734.85,5861.57 ; v1(7150,5781.89) C21.1@7150,5861.57 ; C22.1@7350,5861.57 v1@7484.85,5861.57 ; v1(7900,5781.89) C24.1@7900,5861.57 ; C25.1@8100,5861.57 v1@8234.85,5861.57 ; v1(8574.79,5826.76) C30.1@8650,5861.57 ; C31.1@8850,5861.57 v1@8984.85,5861.57 ; v4(9153.54,3375.98) O2.4@9242.13,3375.98
  Top Layer w30: v1(3598.43,5775.59) C5.1@3598.43,5870.08 ; v1(4149.61,5779.53) C7.1@4149.61,5866.14 ; C2.1@11751.97,3277.56 v4(11870.08,3277.56) ; C4.2@12574.78,3259.84 v4(12655.52,3259.84) ; U1.1@12647.64,3435.04 v4(12775.59,3435.04) ; U1.2@12653.52,3499.92 v4(12769.76,3499.92) ; C17.2@13681.1,3277.56 v4(13681.1,3346.46) ; U2.1@13681.82,3418.3 v4(13806.11,3418.3) ; U2.2@13681.82,3485.3 v4(13808.01,3485.3)
  Mid-Layer 1 w6: v3(6608.94,7396.34) v3@6614.17,7401.57
  Bottom Layer w6: v2(9330.71,3818.9) 9349.61,3800 C80.1@9364.41,3800
  Bottom Layer w10: C83.1@9031.5,3927.23 9031.5,3952.76 v2(9055.12,3976.38) ; C109.1@9127.95,3732.28 9135.83,3732.28 v2(9173.23,3769.68) ; C77.1@9281.56,4015.75 9281.56,4045.34 v2(9291.34,4055.12) ; C108.1@9311.02,3297.24 v3(9311.02,3336.61) ; C75.1@9331.69,3946.84 9331.69,3975.39 v2(9330.71,3976.38) v2@9332.68,3978.35 ; C82.1@9596.52,3811.02 9606.3,3820.8 v2(9606.3,3858.27) ; C110.1@9600.39,4645.67 v2(9645.67,4645.67) 9663.32,4628.02 C81.1@9663.32,4606.3
  Bottom Layer w16: P2.1@4850,7487.4 v1(4850,7600) ; P3.1@8000,7550 v1(8000,7662.6) ; P3.3@8100,7550 v1(8100,7662.6) ; P3.5@8200,7550 v1(8200,7662.6) ; P4.1@9100,7550 v1(9100,7662.6) ; P4.3@9200,7550 v1(9200,7662.6) ; P4.5@9300,7550 v1(9300,7662.6) ; P5.1@10200,7550 v1(10200,7662.6) ; P5.3@10300,7550 v1(10300,7662.6) ; P5.5@10400,7550 v1(10400,7662.6)
VCC2: C34.1 C37.1 C39.1 C41.1 C43.1 C45.1 C47.1 C49.1 C50.1 C52.1 C53.1 C55.1 C56.1 C58.1 C59.1 C118.1 DSP8.P1 DSP8.P2 DSP8.P3 DSP9.P1 DSP9.P2 DSP9.P3 DSP10.P1 DSP10.P2 DSP10.P3 DSP11.P1 DSP11.P2 DSP11.P3 DSP12.P1 DSP12.P2 DSP12.P3 DSP13.P1 DSP13.P2 DSP13.P3 DSP14.P1 DSP14.P2 DSP14.P3 DSP15.P1 DSP15.P2 DSP15.P3 PM3.6 | length 5335.1
  Top Layer w18: v1(9738.17,5858.26) DSP8.P1@9852.34,5858.26 ; v1(9738.17,5956.68) DSP8.P3@9852.34,5956.68 ; DSP8.P2@9850.63,5907.4 v1(9956.74,5907.4) ; v1(10488.17,5858.26) DSP9.P1@10602.34,5858.26 ; v1(10488.17,5956.68) DSP9.P3@10602.34,5956.68 ; DSP9.P2@10600.63,5907.4 v1(10706.74,5907.4) ; v1(11238.17,5858.26) DSP10.P1@11352.34,5858.26 ; v1(11238.17,5956.68) DSP10.P3@11352.34,5956.68 ; DSP10.P2@11350.63,5907.4 v1(11456.74,5907.4) ; v1(11993.81,5856.35) DSP11.P1@12107.99,5856.35 ; v1(11993.81,5954.78) DSP11.P3@12107.99,5954.78 ; DSP11.P2@12106.27,5905.5 v1(12212.38,5905.5) ; v1(12738.17,5858.26) DSP12.P1@12852.34,5858.26 ; v1(12738.17,5956.68) DSP12.P3@12852.34,5956.68 ; DSP12.P2@12850.63,5907.4 v1(12956.74,5907.4) ; v1(13488.17,5858.26) DSP13.P1@13602.34,5858.26 ; v1(13488.17,5956.68) DSP13.P3@13602.34,5956.68 ; DSP13.P2@13600.63,5907.4 v1(13706.74,5907.4) ; v1(14238.17,5858.26) DSP14.P1@14352.34,5858.26 ; v1(14238.17,5956.68) DSP14.P3@14352.34,5956.68 ; DSP14.P2@14350.63,5907.4 v1(14456.74,5907.4) ; v1(14988.17,5858.26) DSP15.P1@15102.34,5858.26 ; v1(14988.17,5956.68) DSP15.P3@15102.34,5956.68 ; DSP15.P2@15100.63,5907.4 v1(15206.74,5907.4)
  Top Layer w20: v4(2248.04,7094.5) v4(2375.99,7094.5) ; v4(3142.7,6993.1) PM3.6@3232.28,6993.1 ; v4(3232.28,6903.52) PM3.6@3232.28,6993.1 ; v4(3232.28,7082.67) PM3.6@3232.28,6993.1 ; v4(3321.85,6993.1) PM3.6@3232.28,6993.1 ; v1(10145.65,5783.45) C34.1@10145.65,5862.19 ; v1(10346.44,5779.52) 10346.44,5858.26 v1(10488.17,5858.26) ; v1(10895.65,5783.45) C39.1@10895.65,5862.19 ; v1(11096.44,5779.52) 11096.44,5858.26 v1(11238.17,5858.26) ; v1(11645.65,5783.45) C43.1@11645.65,5862.19 ; v1(11846.44,5779.52) 11846.44,5858.26 v1@11988.17,5858.26 ; v1(12395.65,5783.45) C47.1@12395.65,5862.19 ; v1(12596.44,5779.52) 12596.44,5858.26 v1(12738.17,5858.26) ; v1(13145.65,5783.45) C50.1@13145.65,5862.19 ; v1(13346.44,5779.52) 13346.44,5858.26 v1(13488.17,5858.26) ; v1(13895.65,5783.45) C53.1@13895.65,5862.19 ; v1(14096.44,5779.52) 14096.44,5858.26 v1(14238.17,5858.26) ; v1(14645.65,5783.45) C56.1@14645.65,5862.19 ; v1(14846.44,5779.52) 14846.44,5858.26 v1(14988.17,5858.26) ; v1(15401.54,5779.52) C59.1@15401.54,5858.26
pads on no net: CONN2.2 CONN3.2 DSP0.0 DSP0.P11 DSP1.0 DSP1.P11 DSP2.0 DSP2.P11 DSP3.0 DSP3.P11 DSP4.0 DSP4.P11 DSP5.0 DSP5.P11 DSP6.0 DSP6.P11 DSP7.0 DSP7.P11 DSP8.0 DSP8.P11 DSP9.0 DSP9.P11 DSP10.0 DSP10.P11 DSP11.0 DSP11.P11 DSP12.0 DSP12.P11 DSP13.0 DSP13.P11 DSP14.0 DSP14.P11 DSP15.0 DSP15.P11 FID1.0 FID2.0 FID3.0 FID4.0 FID5.0 FID6.0 FID7.0 FID8.0 FID10.0 FID11.0 FID12.0 J1.0 J2.0 J3.0 JP2.0 JP2.12 JP2.14 O2.1 P1.0 PM1.3 PM1.5 PM1.9 PM1.10 PM2.3 PM2.5 PM2.9 PM2.10 PM3.3 PM3.5 PM3.9 PM3.10 S1.0 S2.0 S3.0 S4.0 S5.0 S6.0 S7.0 S8.0 U3.2 U3.4 U3.5 U3.6 U3.15 U3.16 U3.19 U3.27 U3.28 U3.29 U4.A2 U4.A8 U4.E2 U4.E3 U4.P1 U4.R8 U5.3 U10.A4 U10.A11 U10.A12 U10.A17 U10.A19 U10.A20 U10.AA7 U10.AA8 U10.AA9 U10.AA10 U10.AA17 U10.AA18 U10.AA19 U10.AA20 U10.AB3 U10.AB9 U10.AB10 U10.AB17 U10.AC9 U10.AC17 U10.AD10 U10.AD11 U10.AD12 U10.AD16 U10.AE12 U10.AF10 U10.AF11 U10.B4 U10.B6 U10.B7 U10.B12 U10.B13 U10.B14 U10.B15 U10.B17 U10.B20 U10.B23 U10.B24 U10.C1 U10.C2 U10.C5 U10.C6 U10.C7 U10.C8 U10.C10 U10.C14 U10.C15 U10.C16 U10.C19 U10.C20 U10.C22 U10.D3 U10.D5 U10.D6 U10.D7 U10.D8 U10.D9 U10.D10 U10.D12 U10.D13 U10.D15 U10.D16 U10.D18 U10.D19 U10.D20 U10.D21 U10.D22 U10.E2 U10.E3 U10.E4 U10.E5 U10.E6 U10.E7 U10.E9 U10.E10 U10.E13 U10.E17 U10.E18 U10.E20 U10.E21 U10.E22 U10.E23 U10.E24 U10.E25 U10.E26 U10.F3 U10.F4 U10.F7 U10.F8 U10.F9 U10.F10 U10.F16 U10.F17 U10.F18 U10.F19 U10.F20 U10.F23 U10.F24 U10.F26 U10.G3 U10.G4 U10.G5 U10.G6 U10.G7 U10.G8 U10.G9 U10.G10 U10.G11 U10.G13 U10.G16 U10.G17 U10.G18 U10.G19 U10.G20 U10.G21 U10.G22 U10.G23 U10.G24 U10.G25 U10.G26 U10.H1 U10.H2 U10.H5 U10.H6 U10.H7 U10.H8 U10.H12 U10.H13 U10.H14 U10.H20 U10.H21 U10.H22 U10.H23 U10.H24 U10.J4 U10.J5 U10.J6 U10.J7 U10.J15 U10.J20 U10.J21 U10.K1 U10.K4 U10.K5 U10.K6 U10.K7 U10.K20 U10.K21 U10.K22 U10.K23 U10.K24 U10.L1 U10.L6 U10.L7 U10.L8 U10.L19 U10.L20 U10.L21 U10.L23 U10.L24 U10.M3 U10.M4 U10.M5 U10.M6 U10.M7 U10.M8 U10.M19 U10.M20 U10.M21 U10.M22 U10.M23 U10.M24 U10.M25 U10.N2 U10.N3 U10.N4 U10.N5 U10.N7 U10.N8 U10.N19 U10.N20 U10.N21 U10.N22 U10.N23 U10.P4 U10.P5 U10.P6 U10.P7 U10.P8 U10.P19 U10.P20 U10.P22 U10.P23 U10.R3 U10.R4 U10.R5 U10.R6 U10.R7 U10.R8 U10.R19 U10.R20 U10.R21 U10.R22 U10.R23 U10.R24 U10.T1 U10.T6 U10.T7 U10.T8 U10.T19 U10.T20 U10.T21 U10.T23 U10.T24 U10.T26 U10.U1 U10.U4 U10.U5 U10.U6 U10.U7 U10.U20 U10.U21 U10.U22 U10.U23 U10.U26 U10.V1 U10.V2 U10.V4 U10.V5 U10.V6 U10.V7 U10.V12 U10.V20 U10.V21 U10.V22 U10.V23 U10.V25 U10.V26 U10.W1 U10.W2 U10.W5 U10.W6 U10.W7 U10.W13 U10.W20 U10.W21 U10.W22 U10.W23 U10.W25 U10.W26 U10.Y5 U10.Y6 U10.Y7 U10.Y8 U10.Y9 U10.Y10 U10.Y14 U10.Y16 U10.Y17 U10.Y18 U10.Y19 U10.Y20
copper on no net: | length 39.4
  Mid-Layer 1 w6: 9682.68,7391.73 9682.68,7411.42 ; 10782.68,7391.73 10782.68,7411.42

## Polygon pours and split planes (outlines as drawn)
GND on Top Layer (solid): 11926.9,3352.07 12489.89,3352.07 12489.89,3985.93 11899.34,3985.93 11899.34,3352.07 12017.45,3352.07 12017.45,3348.13
GND on Top Layer (solid): 12950.52,3342.23 13513.52,3342.23 13513.52,3976.08 12922.97,3976.08 12922.97,3342.23 13041.08,3342.23 13041.08,3338.29
GND on Top Layer (solid): 9685.04,4330.71 9566.93,4330.71 9566.93,4448.82 9488.19,4448.82 9488.19,4330.71 9370.08,4330.71 9370.08,4242.13 9488.19,4242.13 9488.19,4133.86 9566.93,4133.86 9566.93,4251.97 9685.04,4251.97
+12VCC on Mid-Layer 1 (solid): 11200,6800 11200.79,7687.01 2057.09,7687.01 2055,3055 3400,3055 3400,6900 11200,6900
+12VCC on Mid-Layer 2 (solid): 5157.48,3098.16 5157.48,4662.76 3425.2,4662.76 3420,6740 2040,6740 2047.24,3058.07 5156.5,3058.07 5156.5,3099.14
VCC2 on Mid-Layer 2 (solid): 2066.93,6751.97 3446.93,6751.97 3446.93,4671.97 5186.93,4671.97 5186.93,3531.97 8720.47,3533.46 8720.47,5068.9 14045.28,5068.9 14039.59,5038.33 14040.69,5038.33 14045.28,3543.31 15886.93,3531.97 15886.93,7671.97 2066.93,7671.97
+2.5VCC on Mid-Layer 2 (solid): 8740.16,5039.37 8740.16,3543.31 9033.79,3543.31 11387.8,3533.46 14025.59,3031.5 14025.59,5039.37
+2.5VCC on Bottom Layer (solid): 8779.53,5019.69 8779.53,4714.57 10364.17,4714.57 10364.17,5049.21 8779.53,5049.21
+5VCC on Bottom Layer (solid): 3931.1,3263.78 3931.1,6053.15 15708.66,6053.15 15694.88,7699.8 3422.24,7701.77 3422.24,3060.04 3932.09,3060.04 3932.09,3264.76
+1.2VCC on Bottom Layer (solid): 11102.36,3840.25 11102.36,4704.72 8996.06,4704.72 8996.06,3796.15 9625.98,3796.15 9625.98,4043.14 9714.57,4043.14 9714.57,4122.53 10157.48,4122.53 10157.48,3769.68 11102.36,3769.68
+1.8VCC on Bottom Layer (solid): 9447.28,3039.8 14092.95,3039.8 14092.95,4171.69 11116.36,4171.69 11116.36,3755.68 10143.48,3755.68 10143.48,4149.39 9728.57,4149.39 9728.57,4060.8 9639.98,4060.8 9639.98,3785.21 9447.28,3785.21
GND on Internal Plane 1 (split plane): 2020.02,3020.01 2020.02,7729.98 15979.99,7729.98 15979.99,3020.01 8970.01,3020.01 8970.01,3440.94 ccw(c8890.94,3440.94) 8890.94,3520.01 5359.06,3520.01 ccw(c5359.06,3440.94) 5279.98,3440.94 5279.98,3020.01
VCC on Internal Plane 2 (split plane): 9266.62,5649.6 ccw(c9271.64,5649.6) 9276.65,5649.6 9276.65,6767.7 ccw(c9271.64,6767.7) 9275.16,6771.27 9275.18,6771.25 9271.24,6775.19 ccw(c9267.7,6771.64) 9264.15,6768.09 9266.62,6765.63
VCC on Internal Plane 2 (split plane): 2020.02,3020.01 5279.98,3020.01 5279.98,3440.94 cw(c5359.06,3440.94) 5359.06,3520.01 8890.94,3520.01 cw(c8890.94,3440.94) 8970.01,3440.94 8970.01,3020.01 15979.99,3020.01 15979.99,6770.56 9686.08,6770.56 9682.18,5654.61 11314.94,5654.61 cw(c11314.94,5649.6) 11319.95,5649.6 cw(c11314.94,5649.6) 11314.94,5644.58 9677.15,5644.58 cw(c9677.15,5649.6) 9672.13,5649.61 9676.07,6775.59 cw(c9681.08,6775.58) 9681.08,6780.59 15979.99,6780.59 15979.99,7729.98 2020.02,7729.98

## Keep-outs
Keep-Out Layer:
  lines w10: 15950,3050 2050,3050 2050,7700 15950,7700 15950,3055.15

## Other copper
Top Layer:
  text "Layer 1" at 16251.94,4889.75 h80
Mid-Layer 1:
  text "Layer 3" at 16248,4590.54 h80
Mid-Layer 2:
  text "Layer 4" at 16255.87,4440.94 h80
Bottom Layer:
  text "Layer 6" at 16259.84,4153.54 h80
Internal Plane 1 (plane layer: these items are gaps in the copper):
  text "Layer 2" at 16255.87,4740.15 h80
Internal Plane 2 (plane layer: these items are gaps in the copper):
  lines w10: 2051.18,7145.65 2055.11,7149.59 ; 9267.7,6771.64 9271.64,6767.7 9271.64,5649.6 ; 11314.94,5649.6 9677.15,5649.6 9681.08,6775.58 16000,6775.58 16000,3003.93 ; 13039.34,3000 16000,3000
  text "Layer 5" at 16255.87,4291.33 h80

## Silkscreen, mask and mechanical layers (free items; w line width, h text height)
Top Overlay:
  drawing of 336 lines, arcs and shapes, not listed
  text "version 1.2.1" at 12800.49,7556.01 h30
  text "Backplane" at 13230.33,7437.58 h160
  text "JTAG" at 5970,7350 h60 r90
  text "POW-EN" at 3100,7320 h40
  text "2007" at 14450.8,7299.79 h80
  text "Copyright Eric Jonas" at 13220.49,7289.95 h60
  text "Soma" at 11626,7201.36 h400
  text "The Wilson Lab, PILM" at 13220.49,7181.68 h60
  text "soma.mit.edu" at 14460.65,7181.68 h80
  text "VCC2 Power Conv" at 2765,7170 h40
  text "FAN 1" at 3681.1,7145.67 h70
  text "FAN2" at 4153.54,7135.83 h70
  text "SiL BOOT" at 7204.72,7116.14 h60
  text "Power" at 11720.45,6944.87 h80
  text "Event" at 12539.34,6936.99 h80
  text "VCC Power Conv" at 3375,5490 h40 r270
  text "+5VCC Power Conv" at 3430,4340 h40
  text "NIC INTERFACE" at 5730,3865 h40
  text "+2.5VCC Power" at 12965,3840 h40
  text "+1.8VCC Power" at 11915,3815 h40
  text "1" at 8565,3765 h40
  text "GND" at 2430,3735 h50
  text "NIC INTERFACE" at 10035,3180 h40
  text "+1.2VCC Power" at 11025,3120 h40
  text "+12V" at 2420,3085 h50
Bottom Overlay:
  text "FRONT PANEL" at 5639.76,7037.4 h80
  text "SYS IO" at 8575,6840 h80
  text "NEP IO" at 9680,6840 h80
  text "ADIO IO" at 10800,6840 h80
Mechanical 4:
  lines w10: 1998.03,4300 15994.09,4300 ; 1998.03,7460.63 15994.09,7460.63 ; 4640,5170 4640,6694.8 ; 5390,5170 5390,6694.8 ; 6140,5170 6140,6694.8 ; 6890,5170 6890,6694.8 ; 7640,5170 7640,6694.8 ; 8390,5170 8390,6694.8 ; 9140,5170 9140,6694.8 ; 9890,5170 9890,6694.8 ; 10640,5170 10640,6694.8 ; 11390,5170 11390,6694.8 ; 12140,5170 12140,6694.8 ; 12890,5170 12890,6694.8 ; 13640,5170 13640,6694.8 ; 14390,5170 14390,6694.8 ; 3890,5170 3890,6694.8 3890,5170 ; 3890,5170 15140,5170 ; 15140,5170 15140,6694.8 15140,5170
Mechanical 5:
  the board outline again, w1
Drill Drawing:
  text ".LEGEND" at 16200,3200 h60
  text "Drill Drawing." at 16200,3100 h60

## Dimensions
2050,3050 to 15950,3050 on Mechanical 1
2050,3050 to 2050,7700 on Mechanical 1